# Altium PCB controller.PcbDoc
Units mm, origin at the board's own origin, x right, y up, seen from the top; angles counter-clockwise.
Board outline 112 x 57 mm, 2 copper layers (Top Layer, Bottom Layer), stack 0.571 mm thick; 6 components, 40 nets, 138 pads, 0 vias.
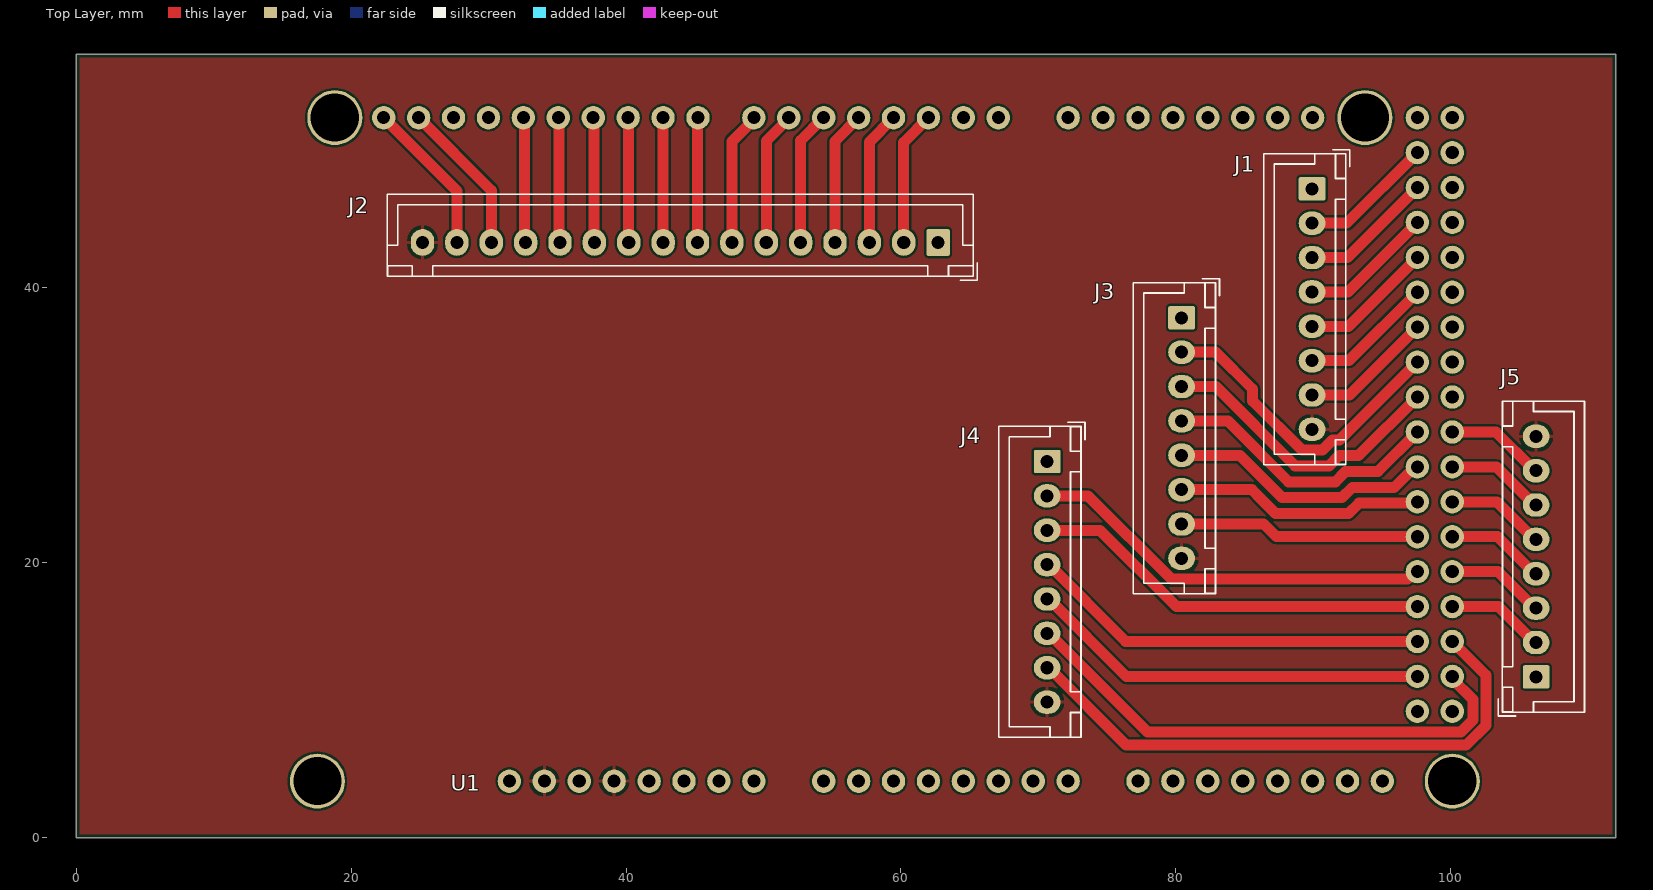
[diagram p0: Top Layer view]
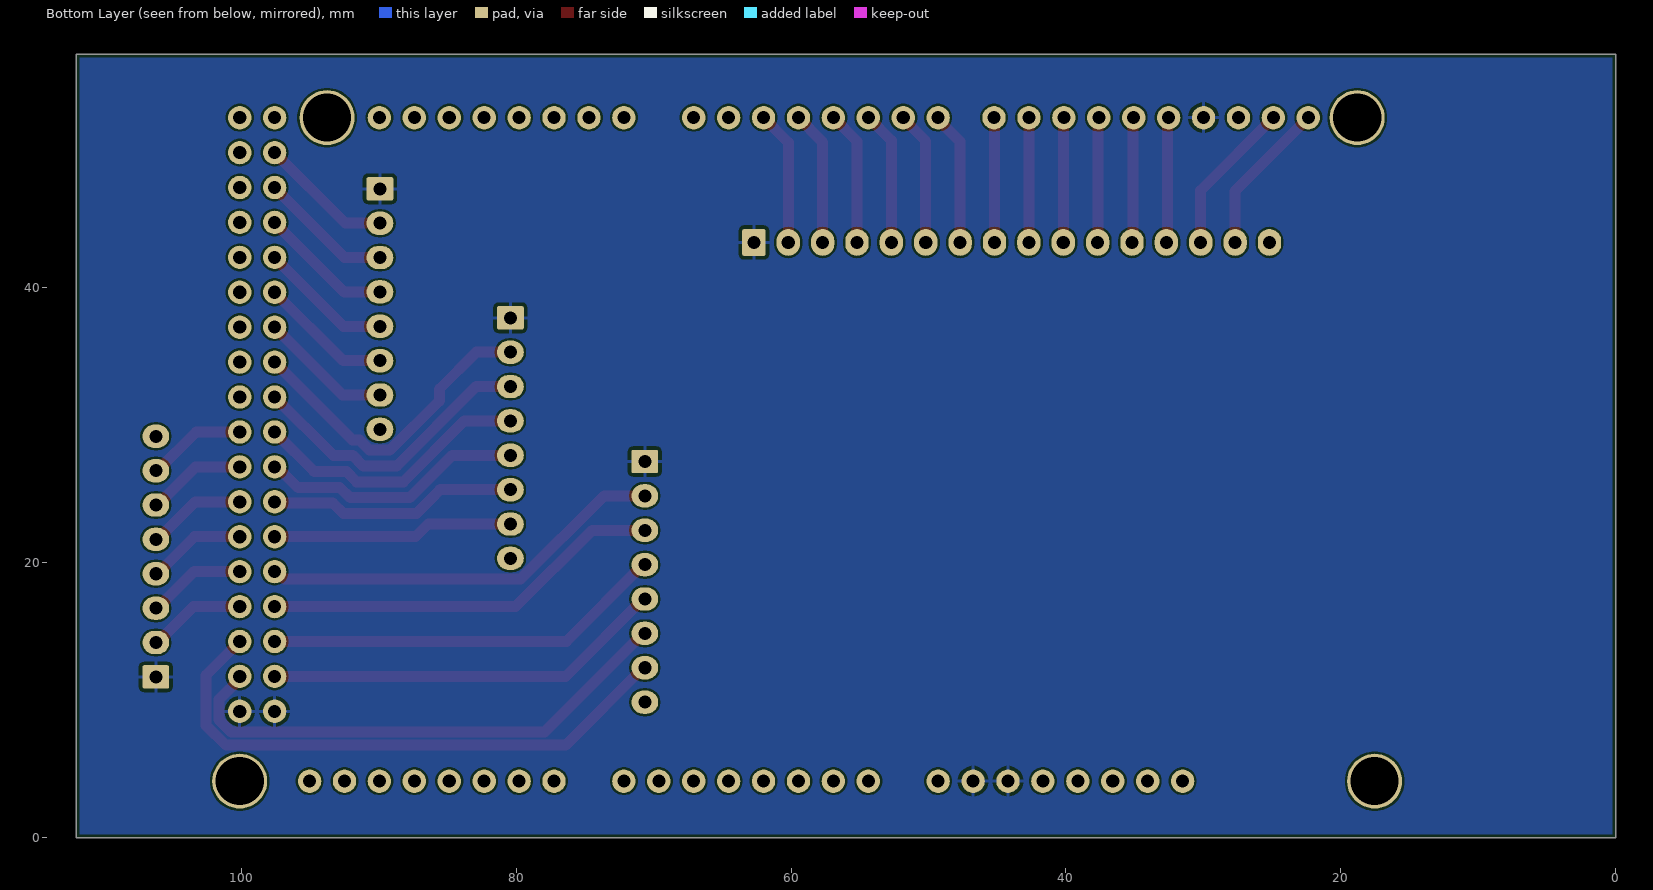
[diagram p1: Bottom Layer view, seen from below]

## Layer stack, top to bottom
Top Solder: solder mask 0.0102, Solder Resist, Dk 3.5
Top Layer: signal copper 0.0356
Dielectric 1: dielectric 0.5, FR-4, Dk 4.8
Bottom Layer: signal copper 0.0356
Bottom Solder: solder mask 0.0102, Solder Resist, Dk 3.5

## Board outline
0,0 112,0 112,57 0,57

## Design rules (kind name [scope] priority, off if disabled: settings)
BoardOutlineClearance [All] p1: gap=0.254 ignorepadtopadclearanceinfootprint=FALSE
Clearance [All] p1: gap=0.152 ignorepadtopadclearanceinfootprint=FALSE
DiffPairsRouting [All] p1: maxlimit=1 minlimit=0.152 mostfreqgap=0.254 toplayer_minwidth=0.152 toplayer_maxwidth=1 toplayer_prefwidth=0.381 bottomlayer_minwidth=0.152 bottomlayer_maxwidth=1 bottomlayer_prefwidth=0.381 maxuncoupledlength=12.7
HoleSize [All] p1: absolutevalues=TRUE maxlimit=7 minlimit=0.152 maxpercent=80.000 minpercent=20.000
MatchedLengths [InDifferentialPair('No Differential Pair')] p1: tolerance=0.2 checknetsindiffpair=FALSE checkdiffpairvsdiffpair=TRUE checkxsignals=TRUE checkothers=TRUE usedelayunits=TRUE delaytolerance=0.200000
MinimumSolderMaskSliver [All] p1: minsoldermaskwidth=0.025
PlaneConnect [All] p1: pad.planeconnectstyle=Relief pad.reliefexpansion=0.508 pad.reliefentries=4 pad.reliefconductorwidth=0.5 pad.reliefairgap=0.254 via.planeconnectstyle=Direct via.reliefexpansion=0.508 via.reliefentries=4 via.reliefconductorwidth=0.254 via.reliefairgap=0.254
PolygonConnect [All] p1: thpad.connectstyle=Relief thpad.reliefconductorwidth=0.254 thpad.reliefentries=4 thpad.polygonreliefangle="90 Angle" thpad.airgapwidth=0.254 smdpad.connectstyle=Relief smdpad.reliefconductorwidth=0.254 smdpad.reliefentries=4 smdpad.polygonreliefangle="90 Angle" smdpad.airgapwidth=0.254 via.connectstyle=Direct via.reliefconductorwidth=0.254 via.reliefentries=4 via.polygonreliefangle="90 Angle" via.airgapwidth=0.254
RoomDefinition controller [InComponentClass('controller')] p1: confinementstyle=ConfineIn formatcopy=TRUE lockcomponents=FALSE outline 0,0 112,0 112,57 0,57
RoutingVias [All] p1: holewidth=0.4 width=1 viastyle="Through Hole" minholewidth=0.3 minwidth=0.8 maxholewidth=5 maxwidth=10 useviatemplates=TRUE viatemplateguid#1={7D50BB3B-B87B-45CD-B895-B18DCEA03572} viatemplatename#1=30x70
SilkToSilkClearance [All] p1: silktosilkclearance=0.152
SilkToSolderMaskClearance [IsPad] p1: minsilkscreentomaskgap=0.025 clearancetoexposedcopper=TRUE
SolderMaskExpansion [All] p1: expansion=0.102 istentingtop=FALSE
Width [All] p1: maxlimit=2.54 minlimit=0.152 preferedwidth=0.254
24 further rules are at their usual default settings.

## Components (designator, comment, footprint, x,y, rotation, side; value= is the part's Value field where it differs from the comment)
J1 "8-pin" JST_XH_B8B-XH-A_1x08_P2.50mm_Vertical 89.9,47.2 r270 top
J2 "16-pin" JST_XH_B16B-XH-A_1x16_P2.50mm_Vertical 62.7,43.3 r180 top
J3 "8-pin" JST_XH_B8B-XH-A_1x08_P2.50mm_Vertical 80.412,37.817 r270 top
J4 "8-pin" JST_XH_B8B-XH-A_1x08_P2.50mm_Vertical 70.633,27.363 r270 top
J5 "8-pin" JST_XH_B8B-XH-A_1x08_P2.50mm_Vertical 106.2,11.7 r90 top
U1 "arduino_due" ARDUINO_DUE 34.057,4.115 r90 top locked

## Footprints (in the part's own frame and the unit in brackets; to place one, negate y for a bottom-side part, rotate by r counter-clockwise, add the part's x,y. Pads: shape width x height; smd on the part's side, far side on the other; paste and mask are expansions set on the pad)
ARDUINO_DUE [mm]
  round 1.7 hole 0.95 paste-1: 1(0,2.54) 2(0,0) 3(0,-2.54) 4(0,-5.08) 5(0,-7.62) 6(0,-10.16) 7(0,-12.7) 8(0,-15.24) 9(0,-20.32) 10(0,-22.86) 11(0,-25.4) 12(0,-27.94) 13(0,-30.48) 14(0,-33.02) 15(0,-35.56) 16(0,-38.1) 17(0,-43.18) 18(0,-45.72) 19(0,-48.26) 20(0,-50.8) 21(0,-53.34) 22(0,-55.88) 23(0,-58.42) 24(0,-60.96) 25(48.26,-63.5) 26(48.26,-66.04) 27(45.72,-63.5) 28(45.72,-66.04) 29(43.18,-63.5) 30(43.18,-66.04) 31(40.64,-63.5) 32(40.64,-66.04) 33(38.1,-63.5) 34(38.1,-66.04) 35(35.56,-63.5) 36(35.56,-66.04) 37(33.02,-63.5) 38(33.02,-66.04) 39(30.48,-63.5) 40(30.48,-66.04) 41(27.94,-63.5) 42(27.94,-66.04) 43(25.4,-63.5) 44(25.4,-66.04) 45(22.86,-63.5) 46(22.86,-66.04) 47(20.32,-63.5) 48(20.32,-66.04) 49(17.78,-63.5) 50(17.78,-66.04) 51(15.24,-63.5) 52(15.24,-66.04) 53(12.7,-63.5) 54(12.7,-66.04) 55(10.16,-63.5) 56(10.16,-66.04) 57(7.62,-63.5) 58(7.62,-66.04) 59(5.08,-63.5) 60(5.08,-66.04) 61(48.26,-55.88) 62(48.26,-53.34) 63(48.26,-50.8) 64(48.26,-48.26) 65(48.26,-45.72) 66(48.26,-43.18) 67(48.26,-40.64) 68(48.26,-38.1) 69(48.26,-33.02) 70(48.26,-30.48) 71(48.26,-27.94) 72(48.26,-25.4) 73(48.26,-22.86) 74(48.26,-20.32) 75(48.26,-17.78) 76(48.26,-15.24) 77(48.26,-11.176) 78(48.26,-8.636) 79(48.26,-6.096) 80(48.26,-3.556) 81(48.26,-1.016) 82(48.26,1.524) 83(48.26,4.064) 84(48.26,6.604) 85(48.26,9.144) 86(48.26,11.684)
  round 4 hole 3.5 paste-1: NC(0,16.51) NC(0,-66.04) NC(48.26,15.24) NC(48.26,-59.69)
  body extent -2.54,-71.04 50.8,32.44, height 2.55
JST_XH_B8B-XH-A_1x08_P2.50mm_Vertical [mm]
  rrect15% 1.7x1.95 hole 0.95: 1(0,0)
  rrect100% 1.7x1.95 hole 0.95: 2(2.5,0) 3(5,0) 4(7.5,0) 5(10,0) 6(12.5,0) 7(15,0) 8(17.5,0)
  silkscreen extent -2.85,-3.51 20.06,2.75
JST_XH_B16B-XH-A_1x16_P2.50mm_Vertical [mm]
  rrect15% 1.7x1.95 hole 0.95: 1(0,0)
  rrect100% 1.7x1.95 hole 0.95: 2(2.5,0) 3(5,0) 4(7.5,0) 5(10,0) 6(12.5,0) 7(15,0) 8(17.5,0) 9(20,0) 10(22.5,0) 11(25,0) 12(27.5,0) 13(30,0) 14(32.5,0) 15(35,0) 16(37.5,0)
  silkscreen extent -2.85,-3.51 40.06,2.75

## Nets (pads, with @x,y where several pads share a name; then routed paths per layer and width w, separated by ;. In a path a pad name is that pad's centre, name@x,y a point inside that pad or via, vN(x,y) a via of type N, cw(c..) or ccw(c..) an arc to the next point about the centre after c; other vN are vias at no path point)
+3.3V: J1.8 J2.16 J3.8 J4.8 J5.8 U1.2 U1.4
DGND: J1.1 J2.1 J3.1 J4.1 J5.1 U1.6 U1.7 U1.59 U1.60 U1.83
NetJ1_2: J1.2 U1.27 | length 9.8
  Top Layer w0.8: J1.2 92.422,44.7 U1.27
NetJ1_3: J1.3 U1.29 | length 9.8
  Top Layer w0.8: J1.3 92.462,42.2 U1.29
NetJ1_4: J1.4 U1.31 | length 9.8
  Top Layer w0.8: J1.4 92.502,39.7 U1.31
NetJ1_5: J1.5 U1.33 | length 9.7
  Top Layer w0.8: J1.5 92.542,37.2 U1.33
NetJ1_6: J1.6 U1.35 | length 9.7
  Top Layer w0.8: J1.6 92.582,34.7 U1.35
NetJ1_7: J1.7 U1.37 | length 9.7
  Top Layer w0.8: J1.7 92.622,32.2 U1.37
NetJ2_2: J2.2 U1.71 | length 9.8
  Top Layer w0.8: J2.2 60.2,50.578 U1.71
NetJ2_3: J2.3 U1.72 | length 9.8
  Top Layer w0.8: J2.3 57.7,50.618 U1.72
NetJ2_4: J2.4 U1.73 | length 9.8
  Top Layer w0.8: J2.4 55.2,50.658 U1.73
NetJ2_5: J2.5 U1.74 | length 9.8
  Top Layer w0.8: J2.5 52.7,50.698 U1.74
NetJ2_6: J2.6 U1.75 | length 9.8
  Top Layer w0.8: J2.6 50.2,50.689 51.837,52.326 U1.75
NetJ2_7: J2.7 U1.76 | length 9.7
  Top Layer w0.8: J2.7 47.7,50.649 49.297,52.246 U1.76
NetJ2_8: J2.8 U1.77 | length 9.1
  Top Layer w0.8: J2.8 45.217,43.316 45.217,52.358 U1.77
NetJ2_9: J2.9 U1.78 | length 9.1
  Top Layer w0.8: U1.78 42.697,52.371 42.697,43.303 J2.9
NetJ2_10: J2.10 U1.79 | length 9.1
  Top Layer w0.8: U1.79 40.177,52.351 40.177,43.323 J2.10
NetJ2_11: J2.11 U1.80 | length 9.1
  Top Layer w0.8: U1.80 37.657,52.331 37.657,43.343 J2.11
NetJ2_12: J2.12 U1.81 | length 9.1
  Top Layer w0.8: U1.81 35.137,52.311 35.137,43.363 J2.12
NetJ2_13: J2.13 U1.82 | length 9.1
  Top Layer w0.8: U1.82 32.617,52.291 32.617,43.383 J2.13
NetJ2_14: J2.14 U1.85 | length 11.3
  Top Layer w0.8: U1.85 30.2,47.088 J2.14
NetJ2_15: J2.15 U1.86 | length 11.3
  Top Layer w0.8: U1.86 27.7,47.048 J2.15
NetJ3_2: J3.2 U1.39 | length 23.2
  Top Layer w0.8: J3.2 82.887,35.317 85.582,32.622 85.582,31.768 89.153,28.198 90.647,28.198 91.391,28.941 91.903,28.941 U1.39
NetJ3_3: J3.3 U1.41 | length 21.6
  Top Layer w0.8: J3.3 82.904,32.817 88.675,27.045 91.125,27.045 91.868,27.789 93.291,27.789 U1.41
NetJ3_4: J3.4 U1.43 | length 20.5
  Top Layer w0.8: J3.4 83.774,30.317 88.198,25.893 91.602,25.893 92.345,26.636 94.678,26.636 U1.43
NetJ3_5: J3.5 U1.45 | length 19.3
  Top Layer w0.8: J3.5 84.644,27.817 87.721,24.74 92.079,24.74 92.823,25.484 95.876,25.484 97.368,26.975 U1.45
NetJ3_6: J3.6 U1.47 | length 18.2
  Top Layer w0.8: J3.6 85.514,25.317 86.164,24.668 87.243,23.588 92.557,23.588 93.3,24.331 97.453,24.331 U1.47
NetJ3_7: J3.7 U1.49 | length 17.5
  Top Layer w0.8: J3.7 86.385,22.817 87.307,21.895 U1.49
NetJ4_2: J4.2 U1.51 | length 29.7
  Top Layer w0.8: J4.2 73.616,24.863 79.665,18.815 96.827,18.815 97.368,19.355 U1.51
NetJ4_3: J4.3 U1.53 | length 29.2
  Top Layer w0.8: J4.3 74.487,22.363 80.035,16.815 U1.53
NetJ4_4: J4.4 U1.55 | length 29.2
  Top Layer w0.8: J4.4 70.758,19.863 76.346,14.275 U1.55
NetJ4_5: J4.5 U1.57 | length 29.3
  Top Layer w0.8: J4.5 70.758,17.363 76.386,11.735 U1.57
NetJ4_6: J4.6 U1.58 | length 38.1
  Top Layer w0.8: J4.6 70.758,14.863 77.928,7.693 100.719,7.693 101.599,8.573 101.599,10.043 100.097,11.546 U1.58
NetJ4_7: J4.7 U1.56 | length 42
  Top Layer w0.8: J4.7 70.758,12.363 76.381,6.74 101.114,6.74 102.552,8.178 102.552,11.82 U1.56
NetJ5_2: J5.2 U1.54 | length 7.2
  Top Layer w0.8: U1.54 103.46,16.815 106.075,14.2 J5.2
NetJ5_3: J5.3 U1.52 | length 7.2
  Top Layer w0.8: U1.52 103.42,19.355 106.075,16.7 J5.3
NetJ5_4: J5.4 U1.50 | length 7.2
  Top Layer w0.8: U1.50 103.38,21.895 106.075,19.2 J5.4
NetJ5_5: J5.5 U1.48 | length 7.2
  Top Layer w0.8: U1.48 103.34,24.435 106.075,21.7 J5.5
NetJ5_6: J5.6 U1.46 | length 7.3
  Top Layer w0.8: U1.46 103.3,26.975 106.075,24.2 J5.6
NetJ5_7: J5.7 U1.44 | length 7.3
  Top Layer w0.8: U1.44 103.26,29.515 106.075,26.7 J5.7
pads on no net: U1.1 U1.3 U1.5 U1.8 U1.9 U1.10 U1.11 U1.12 U1.13 U1.14 U1.15 U1.16 U1.17 U1.18 U1.19 U1.20 U1.21 U1.22 U1.23 U1.24 U1.25 U1.26 U1.28 U1.30 U1.32 U1.34 U1.36 U1.38 U1.40 U1.42 U1.61 U1.62 U1.63 U1.64 U1.65 U1.66 U1.67 U1.68 U1.69 U1.70 U1.84 U1.NC

## Polygon pours and split planes (outlines as drawn)
+3.3V on Top Layer "NONET_L02_P-001" (solid, pour order 0): 0,57 112,57 112,0 0,0
DGND on Bottom Layer "NONET_L02_P-001" (solid, pour order 1): 0,57 112,57 112,0 0,0

## Text inside footprints (layer, text, board x,y; h text height)
J1: Mechanical 6 "%R" at 86.907,38.843 h1 r270
J2: Mechanical 6 "%R" at 44.343,46.293 h1 r180
J3: Mechanical 6 "%R" at 77.419,29.46 h1 r270
J4: Mechanical 6 "%R" at 67.64,19.006 h1 r270
J5: Mechanical 6 "%R" at 109.193,20.057 h1 r90